# EAGLE board PCB Capacitor (EAGLE 9.6.2)
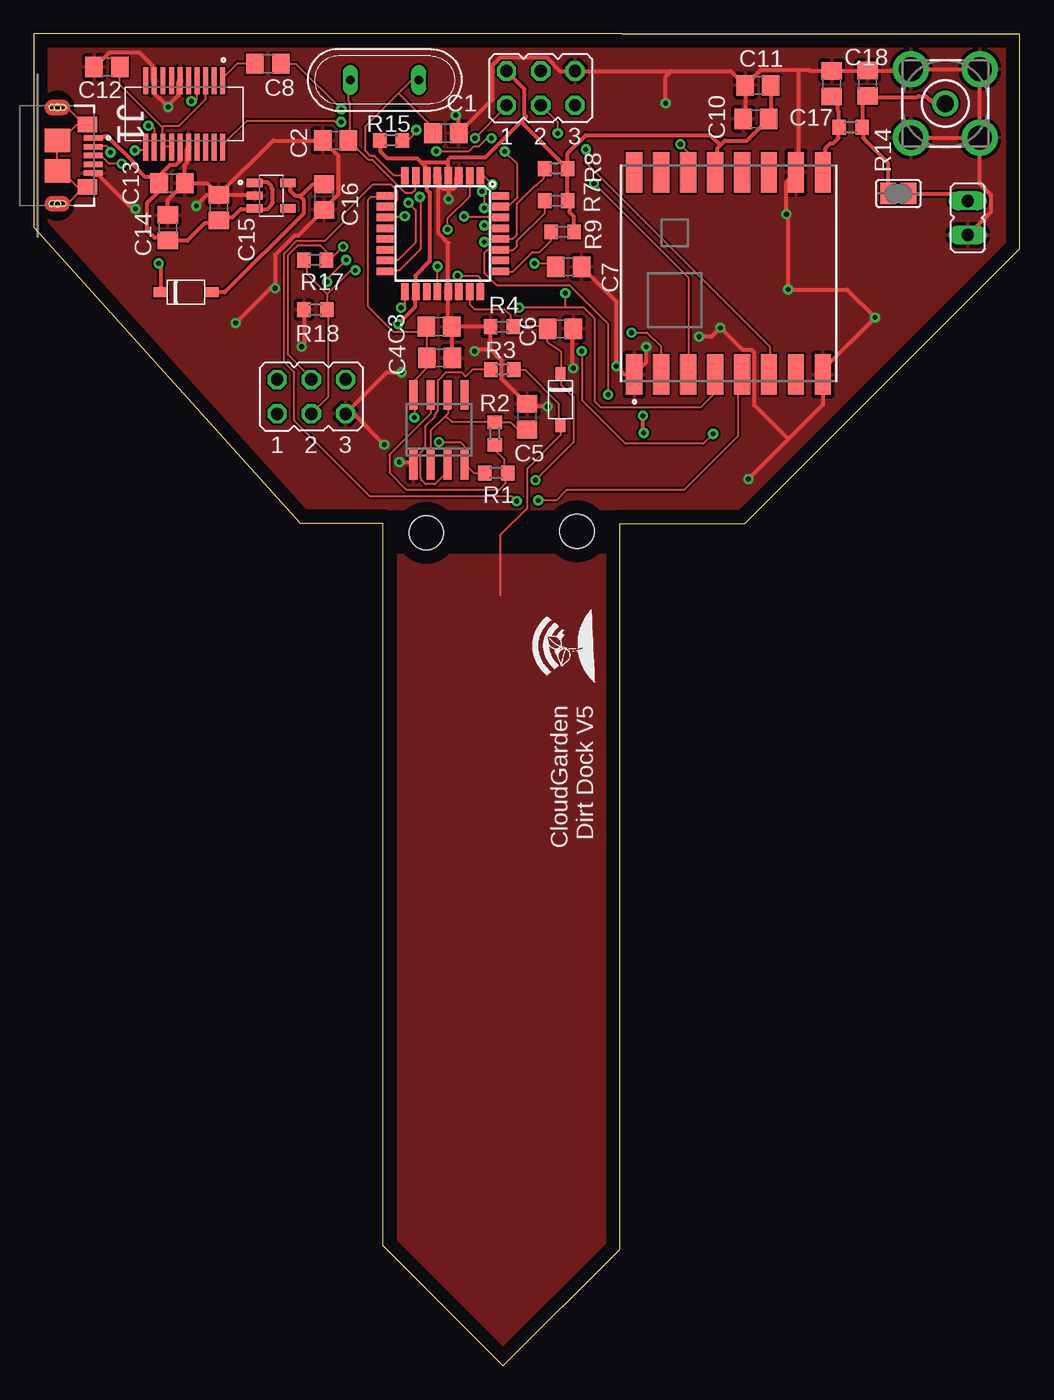
[diagram p0: board, top side]
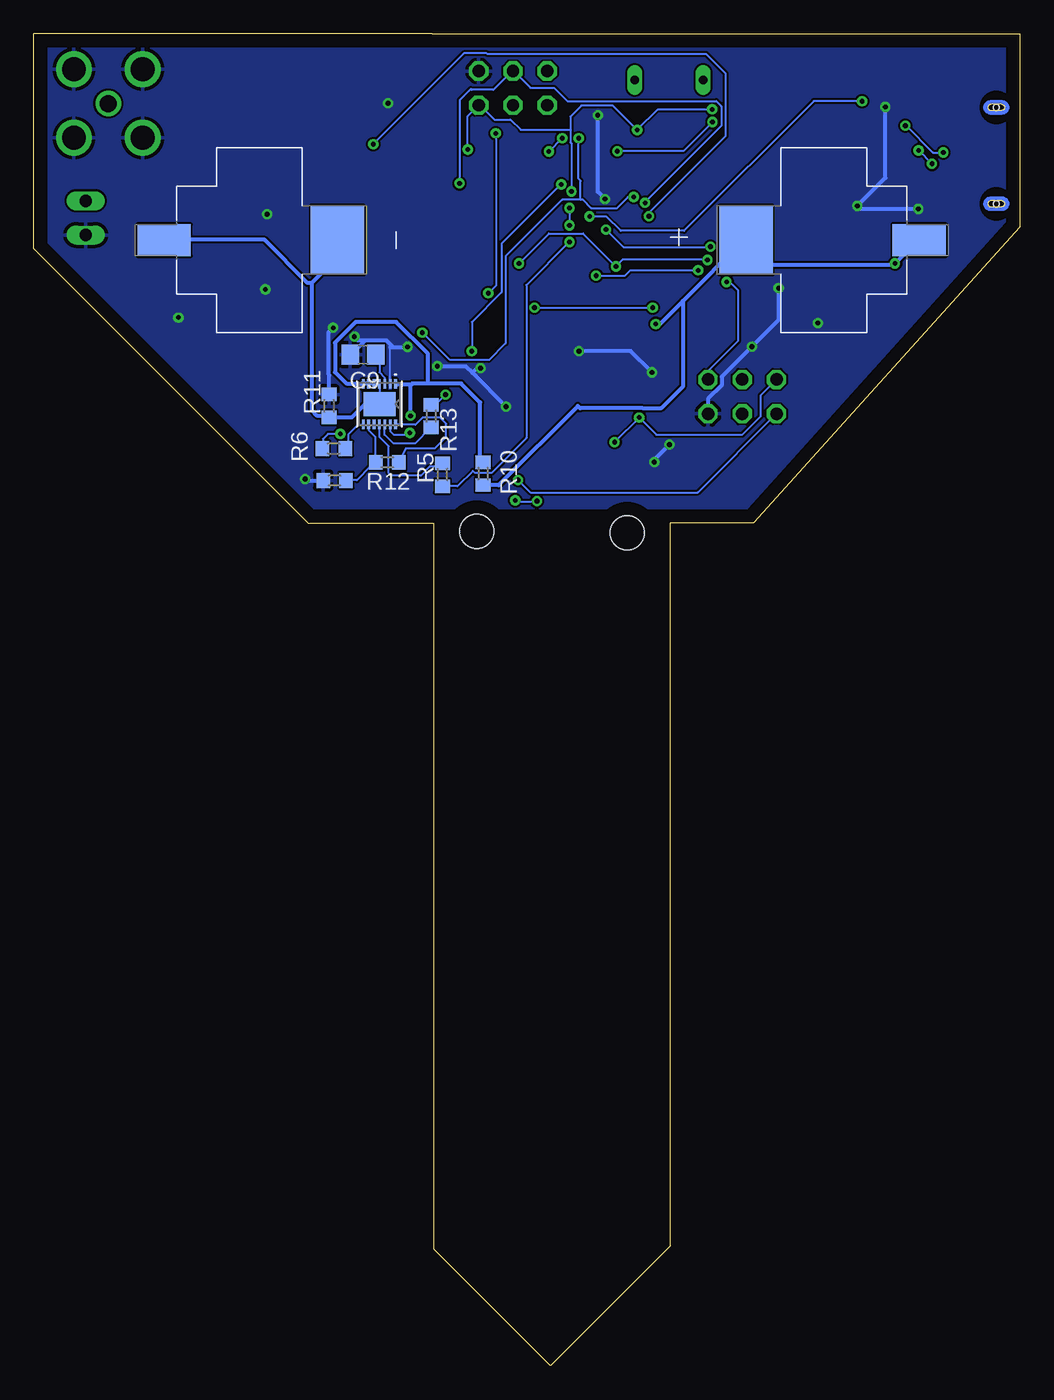
[diagram p1: board, bottom side, seen from below]

Size 73.18 x 98.83 mm. Coordinates in mm from the lower left corner, seen from the top.
Outline: 26.09,98.83 26.09,98.83
Outline: 43.64,98.83 43.64,98.83
Outline: 43.64,98.83 26.09,98.83
Outline: 26.09,98.83 0,98.83 0,84.48 19.79,62.51 25.93,62.51 25.93,8.89 34.82,0 43.48,8.66 43.48,62.48 52.78,62.48 73.18,82.88 73.18,98.83 43.64,98.83
Copper layers (1*16): Top 0.035mm / dielectric 1.5mm / Bottom 0.035mm
Design rules "default": minimum track width 6mil, minimum drill 0.35mm, track to track 6mil, track to pad 6mil, pad to pad 6mil, via to via 6mil, smd to smd 6mil, copper to edge 40mil, drill to drill 6mil, minimum pad ring 10mil, minimum via ring 8mil, stop-mask expansion 4mil, vias tented up to drill 0mil, thermal gap 10mil
Net classes: 0 default: width 0.152 mm; 1 Power: width 0.305 mm
Holes 2.54 mm at 29.13,61.8 40.31,61.93

## Footprints (pad centres in the part's own frame; a part is rotated, then mirrored left to right if it is on the bottom)
BAT_BK-53 = smd 2.34 x 3.96: 1+ 0,28.015; 2- 0,-28.015 | smd 5.08 x 3.96: 1- 0,-15.165; 2+ 0,15.165
C0805 = smd 1.3 x 1.5: 1 -0.95,0; 2 0.95,0
SOD-123 = smd 0.762 x 1.016: A 0,-1.905; C 0,1.905
SO08 = smd 0.6 x 2.2: 1 -1.905,-2.6; 2 -0.635,-2.6; 3 0.635,-2.6; 4 1.905,-2.6; 5 1.905,2.6; 6 0.635,2.6; 7 -0.635,2.6; 8 -1.905,2.6
GCT_USB3076-XX-X_REVC = smd 0.4 x 1.4: 1 -1.3,2.65; 2 -0.65,2.65; 3 0,2.65; 4 0.66,2.65; 5 1.3,2.65 | smd 0.1 x 0.1: 6 -3.549,0.73; 7 3.601,0.73 | smd 1.15 x 1.45: 8 -2.32,2.23; 9 2.32,2.23 | smd 1.75 x 1.9: 10 -1.125,0; 11 1.125,0 | hole 0.45: -3.575,0; 3.575,0
JP3Q = drill 0.914 octagon: 1 -2.54,-1.27; 2 -2.54,1.27; 3 0,-1.27; 4 0,1.27; 5 2.54,-1.27; 6 2.54,1.27
JP1 = drill 0.914 long: 1 0,-1.27; 2 0,1.27
QS = drill 0.61 long: 1 -2.54,0; 2 2.54,0
R0603 = smd 1 x 1.1: 1 -0.85,0; 2 0.85,0
SJ = smd 1.168 x 1.6: 1 -0.762,0; 2 0.762,0
SOT-23-5 = smd 1.16 x 0.61: 1 -1.23,0.95; 2 -1.23,0; 3 -1.23,-0.95; 4 1.23,-0.95; 5 1.23,0.95
MOD_COM-13909 = smd 3 x 1.2: 1 -7.5,7; 2 -7.5,5; 3 -7.5,3; 4 -7.5,1; 5 -7.5,-1; 6 -7.5,-3; 7 -7.5,-5; 8 -7.5,-7; 9 7.5,-7; 10 7.5,-5; 11 7.5,-3; 12 7.5,-1; 13 7.5,1; 14 7.5,3; 15 7.5,5; 16 7.5,7
21-0137_T1433-2C_MXM = smd 0.711 x 0.203: 1 -1.499,1.2; 2 -1.499,0.8; 3 -1.499,0.4; 4 -1.499,0; 5 -1.499,-0.4; 6 -1.499,-0.8; 7 -1.499,-1.2; 8 1.499,-1.2; 9 1.499,-0.8; 10 1.499,-0.4; 11 1.499,0; 12 1.499,0.4; 13 1.499,0.8; 14 1.499,1.2 | smd 1.803 x 2.388: 15 0,0
SOP63P599X175-20N = smd 1.97 x 0.41: 1 -2.47,2.857; 2 -2.47,2.223; 3 -2.47,1.587; 4 -2.47,0.953; 5 -2.47,0.318; 6 -2.47,-0.318; 7 -2.47,-0.953; 8 -2.47,-1.587; 9 -2.47,-2.223; 10 -2.47,-2.857; 11 2.47,-2.857; 12 2.47,-2.223; 13 2.47,-1.587; 14 2.47,-0.953; 15 2.47,-0.318; 16 2.47,0.318; 17 2.47,0.953; 18 2.47,1.587; 19 2.47,2.223; 20 2.47,2.857
TQFP32-08 = smd 1.27 x 0.559: 1 -4.293,2.8; 2 -4.293,2; 3 -4.293,1.2; 4 -4.293,0.4; 5 -4.293,-0.4; 6 -4.293,-1.2; 7 -4.293,-2; 8 -4.293,-2.8; 17 4.293,-2.8; 18 4.293,-2; 19 4.293,-1.2; 20 4.293,-0.4; 21 4.293,0.4; 22 4.293,1.2; 23 4.293,2; 24 4.293,2.8 | smd 0.559 x 1.27: 9 -2.8,-4.293; 10 -2,-4.293; 11 -1.2,-4.293; 12 -0.4,-4.293; 13 0.4,-4.293; 14 1.2,-4.293; 15 2,-4.293; 16 2.8,-4.293; 25 2.8,4.293; 26 2,4.293; 27 1.2,4.293; 28 0.4,4.293; 29 -0.4,4.293; 30 -1.2,4.293; 31 -2,4.293; 32 -2.8,4.293
BU-SMA-V = drill 1.27: 1 0,0 | drill 1.778: 2 -2.55,2.55; 3 2.55,2.55; 4 2.55,-2.55; 5 -2.55,-2.55

## Placement (x,y rotation side)
BT2  BK-53  [BAT_BK-53]  35.48,83.52 270 bottom
C1  22p  [C0805]  30.58,91.44 0 top
C2  22p  [C0805]  22.4,90.91 180 top
C3  140n  [C0805]  30.07,77.09 0 top
C4  120n  [C0805]  30.12,74.78 0 top
C5  660p  [C0805]  36.6,70.41 90 top
C6  1u  [C0805]  39.09,76.94 0 top
C7  0.1u  [C0805]  39.7,81.53 0 top
C8  0.1u  [C0805]  17.37,96.6 0 top
C9  0.47u  [C0805]  48.74,75.03 180 bottom
C10  10u  [C0805]  53.59,92.51 180 top
C11  0.1u  [C0805]  53.75,95 180 top
C12  0.1u  [C0805]  5.44,96.37 180 top
C13  10u  [C0805]  10.26,87.73 0 top
C14  0.1u  [C0805]  9.96,84.43 90 top
C15  1u  [C0805]  13.74,85.93 90 top
C16  1u  [C0805]  21.54,86.72 270 top
C17  opt  [C0805]  59.21,95.12 90 top
C18  opt  [C0805]  61.87,95.15 90 top
D1  DIODE_SCHOTTKY_CMMSH2-40  [SOD-123]  11.3,79.65 90 top
D11  DIODE_SCHOTTKY_CMMSH2-40  [SOD-123]  39.09,71.68 0 top
IC2  NE555D  [SO08]  30.07,69.44 0 top
J1  USB3076-XX-X_REVC  [GCT_USB3076-XX-X_REVC]  1.75,89.79 270 top
JP2  [JP3Q]  37.62,94.79 0 top
JP3  [JP1]  69.32,85.17 180 top
JP5  [JP3Q]  20.6,71.91 0 top
Q2  8 MHz  [QS]  26.04,95.4 0 top
R1  330  [R0603]  34.32,66.24 180 top
R2  1600  [R0603]  34.21,69.16 270 top
R3  10k  [R0603]  34.77,73.91 0 top
R4  1M  [R0603]  34.75,77.09 0 top
R5  150  [R0603]  42.85,66.12 90 bottom
R6  1k  [R0603]  50.9,68.05 0 bottom
R7  OPT  [R0603]  38.79,86.44 0 top
R8  OPT  [R0603]  38.76,88.82 0 top
R9  100  [R0603]  39.24,84.12 0 top
R10  10  [R0603]  39.83,66.19 90 bottom
R11  0.1  [R0603]  51.26,71.22 90 bottom
R12  10k  [R0603]  46.94,67.03 180 bottom
R13  150  [R0603]  43.69,70.46 270 bottom
R14  opt  [R0603]  60.63,91.9 0 top
R15  OPT  [R0603]  26.52,90.91 180 top
R17  10k  [R0603]  20.88,82.04 0 top
R18  THERM  [R0603]  20.9,78.36 0 top
R19  THERM  [R0603]  50.85,65.68 180 bottom
SJ1  [SJ]  64.16,86.97 0 top
TLV75533PDBVR  LP2985-33DBVR  [SOT-23-5]  17.63,86.82 0 top
U1  COM-13909  [MOD_COM-13909]  51.56,81.05 90 top
U2  MAX17201G+T  [21-0137_T1433-2C_MXM]  47.52,71.35 270 bottom
U4  FT231XS-R  [SOP63P599X175-20N]  11.18,92.89 270 top
U5  ATMEGA328P_TQFP  [TQFP32-08]  30.35,84 270 top
X1  BU-SMA-V  [BU-SMA-V]  67.64,93.65 0 top

## Library data of the parts
BT2 = BK-53; DESCRIPTION: Battery Contact Clip AA 1 Cell SMD (SMT) Tab; DIGI-KEY_PART_NUMBER: BK-53-TR-ND; MF: MPD (Memory Protection Devices); MP: BK-53; PACKAGE: None; PURCHASE-URL: https://pricing.snapeda.com/search/part/BK-53/?ref=eda
C1-C18 = rcl; SPICEPREFIX: C
D1 D11 = diode
IC2 = linear
J1 = USB3076-XX-X_REVC; AVAILABILITY: Unavailable; DESCRIPTION: USB - micro B USB 2.0 Receptacle Connector 5 Position Surface Mount, Right Angle; Through Hole, 2.35mm profile, 5 Pins, Horizontal, Bottom mount; MF: Global Connector Technology; MP: USB3076-30-A; PACKAGE: None; PRICE: None
JP2 JP3 JP5 SJ1 = jumper
Q2 = special
R1-R15 R17-R19 = rcl; SPICEPREFIX: R
TLV75533PDBVR = IC; CREATED_BY: PCBLayout.com; DIGIKEY_PART_NUMBER: 296-18476-2-ND; MANUFACTURER: Texas Instruments; MPN: LP2985-33DBVR; PACKAGE: SOT-23-5
U1 = COM-13909; DESCRIPTION: General ISM < 1GHz Transceiver Module 915MHz Surface Mount; DIGI-KEY_PART_NUMBER: 1568-1394-ND; MF: SparkFun Electronics; MP: COM-13909; PACKAGE: None; PURCHASE-URL: https://pricing.snapeda.com/search/part/COM-13909/?ref=eda
U2 = MAX17201G+T; BUILT_BY: UL_Team_Molly; COPYRIGHT: Copyright (C) 2018 Accelerated Designs. All rights reserved; MANUFACTURER_PART_NUMBER: MAX17201G+T; REVISION: 1; SOURCELIBRARY: Maxim_2018-10-24; VENDOR: Maxim Integrated Products
U4 = FT231XS-R; DESCRIPTION: USB Bridge, USB to UART USB 2.0 UART Interface 20-SSOP; DIGI-KEY_PART_NUMBER: 768-1129-1-ND; MF: FTDI,; MP: FT231XS-R; PACKAGE: SSOP-20 FTDI; PURCHASE-URL: https://pricing.snapeda.com/search/part/FT231XS-R/?ref=eda
U5 = SparkFun-IC-Microcontroller; PROD_ID: IC-09069
X1 = con-coax; OC_FARNELL: unknown; OC_NEWARK: unknown

## Nets
5V [Power]: C13.1 C14.1 C15.1 J1.1 TLV75533PDBVR.1 TLV75533PDBVR.3 U4.15
ALERT: R6.1 U5.1
ANTEX: JP3.1 SJ1.2
AREF: C7.1 JP5.6 U5.20
CAP: D11.A R3.2
DTR: C8.1 U4.1
FTDR: C12.1 U4.3 U4.13 U4.14
GND [Power]: C1.2 C2.2 C3.2 C4.2 C5.2 C6.2 C7.2 C9.2 C10.2 C11.2 C12.2 C13.2 C14.2 C15.2 C16.2 C17.2 C18.2 IC2.1 J1.5 JP2.6 JP3.2 JP5.5 R4.1 R11.2 R18.1 R19.2 TLV75533PDBVR.2 U1.1 U1.8 U1.10 U2.2 U4.6 U4.9 U4.16 U5.3 U5.5 U5.21 X1.2 X1.3 X1.4 X1.5
MISO: JP2.1 U1.2 U5.16
MOSI: JP2.4 U1.3 U5.15
N$1: R12.1 U2.14
N$2: IC2.7 R1.1 R2.2
N$3: C5.1 IC2.2 IC2.6 R2.1
N$4 [Power]: BT2.1- BT2.2- R11.1 U2.4 U2.15
N$5: C9.1 U2.3
N$6: C1.1 Q2.2 U5.8
N$7: C2.1 Q2.1 U5.7
N$8: J1.2 U4.12
N$9: IC2.3 R3.1
N$10: J1.3 U4.11
N$12 [Power]: R10.2 U2.1 U2.5 U2.6 U2.7 U2.13
N$13: R12.2 R19.1 U2.9
N$14: R6.2 U2.8
N$15: R13.2 U2.12
N$16: R5.2 U2.11
N$17 [Power]: C16.1 D1.A TLV75533PDBVR.5
N$19 [Power]: C18.1 R14.2 SJ1.1 X1.1
N$24 [Power]: C17.1 R14.1 U1.9
RDY: U1.14 U5.11
RESET: C8.2 JP2.5 R15.1 U1.6 U5.29
RXI: U4.4 U5.30
SCK: JP2.3 U1.4 U5.17
SCL: R5.1 R8.1 U5.28
SDA: R7.1 R13.1 U5.27
SHIELD: J1.6 J1.7 J1.8 J1.9 J1.10 J1.11
SOILI: C3.1 C4.1 IC2.4 IC2.8 JP5.2 R1.2 U5.9
SOILO: C6.1 D11.C JP5.1 R4.2 U5.23
SS: U1.5 U5.10
THERMI: JP5.4 R17.2 U5.2
THERMO: JP5.3 R17.1 R18.2 U5.24
TXO: U4.20 U5.31
VIN [Power]: BT2.1+ BT2.2+ C10.1 C11.1 D1.C JP2.2 R7.2 R8.2 R9.2 R10.1 R15.2 U1.13 U5.4 U5.6 U5.18
VREAD: R9.1 U5.25

## Tracks (layer width: path | path; a pad name or v marks a point on that pad's centre or on a via)
5V
  Top 0.305: J1.1 4.47,91.08 5.08,91.08 5.23,91.24 5.46,91.24 7.44,89.26 7.44,89.03 8.28,88.19 8.81,88.19 9.27,87.73 C13.1 | U4.15 10.87,90.4 10.87,89.41 10.57,89.1 10.11,89.1 9.04,88.04 C13.1 | TLV75533PDBVR.1 16.43,87.81 17.35,87.81 17.65,87.5 17.65,87.35 17.73,87.27 17.73,86.28 17.65,86.21 17.65,86.13 17.35,85.83 16.51,85.83 TLV75533PDBVR.3 16.36,85.83 15.37,85.83 14.76,85.22 14,85.22 13.77,84.99 C15.1 13.61,84.91 13.46,84.76 12.7,84.76 11.4,83.46 C14.1 9.88,83.62 9.8,83.69 8.97,83.69 8.43,84.23 8.43,86.28 9.35,87.2 9.35,87.58 C13.1
ALERT  (via drill 0.35)
  Top 0.152: v50.42,69.14 49.68,68.4 43.92,68.4 40.67,71.65 v40.67,75.29 | v34.04,87.66 33.43,88.27 33.2,88.27 U5.1
  Bottom 0.152: v50.42,69.14 51.33,69.14 51.71,68.76 51.71,68.07 R6.1 | v40.67,75.29 40.67,77.44 38.46,79.65 38.46,83.24 v34.04,87.66
ANTEX
  Top 0.305: SJ1.2 68.78,86.97 JP3.1
AREF  (via drill 0.35)
  Top 0.152: v29.97,81.56 29.92,81.56 29.92,79.73 U5.20 | v37.16,81.79 38.46,81.79 38.68,81.56 C7.1 | v23.19,82.04 21.77,80.62 v21.77,80.42
  Bottom 0.152: v37.16,81.79 34.95,84 32.41,84 v29.97,81.56 29.44,82.09 23.24,82.09 v23.19,82.04 | v21.77,80.42 21.78,80.4 21.53,80.4 20.9,79.78 20.9,76.05 23.14,73.81 JP5.6
CAP
  Top 0.152: R3.2 35.64,73.86 36.47,73.86 38.99,71.35 38.99,69.9 39.07,69.82 D11.A 39.09,69.04 36.63,66.57 36.63,63.65 34.65,61.67 34.65,57.15
  pour Top: 24.66,60.17 24.82,60.17 44.98,60.17 44.98,-1.32 24.66,-1.32
DTR
  Top 0.152: C8.1 16.36,96.65 15.14,96.65 14.07,95.58 14.07,95.43 U4.1
FTDR
  Top 0.152: 9.54,91.88 9.58,91.85 9.58,90.48 U4.13 9.65,90.48 10.19,90.48 U4.14 | 9.54,91.88 6.38,95.05 6.38,96.34 C12.1 | 9.54,91.88 9.65,92 10.79,92 12.78,93.98 12.78,95.35 U4.3
GND  (via drill 0.35)
  Top 0.305: U1.1 43.85,73.55 v43.23,74.17 43.23,78.95 C7.2 | v38.13,71.17 36.79,71.17 C5.2 34.73,73.23 34.73,74.59 33.9,75.42 | C6.2 39.93,76.83 39.93,74.12 v40.03,74.02 | 33.9,75.42 R4.1 C3.2 | C4.2 31.02,74.83 C3.2 | C3.2 30.75,77.36 U5.21 30.75,83.29 30.03,84.02 30.03,87.39 30.17,87.53 | 47.32,96.06 JP2.6 39.05,96.06 38.04,97.08 34.66,97.08 34.06,96.48 34.06,93.97 C1.2 31.53,92.58 v31.32,92.79 | 47.32,96.06 51.73,96.06 C11.2 | C11.2 52.8,92.66 C10.2 | C11.2 53.95,96.15 56.77,96.15 | 56.77,96.15 57.53,96.15 57.61,96.07 C17.2 59.23,96.1 C18.2 64.99,96.1 X1.2 X1.3 X1.4 | X1.5 X1.4 | X1.4 70.19,87.71 71.04,86.86 71.04,85.62 JP3.2 | 56.77,96.15 56.77,88.76 U1.10 55.85,87.84 v55.85,85.45 55.98,85.32 v55.98,79.86 60.35,79.86 v62.43,77.78 58.56,73.9 U1.8 58.56,71.31 55.99,68.75 | C14.2 9.96,86.48 C13.2 | C13.2 12.89,87.73 C15.2 | C15.2 16.34,86.88 TLV75533PDBVR.2 | C13.2 11.21,89.1 11.37,89.26 11.37,90.29 U4.16 | J1.5 4.54,88.35 4.83,88.35 7.36,85.83 v7.54,85.83 | v12.06,86.06 12.89,86.88 C15.2 | U4.6 10.73,95.23 10.73,94.26 9.98,93.51 v9.98,93.4 9.31,94.07 9.27,94.07 8.95,94.38 U4.9 8.83,95.48 8.83,96.46 7.86,97.42 5.61,97.42 4.55,96.37 C12.2 | C15.2 17.77,90.91 C2.2 22.59,89.77 22.59,86.89 21.54,85.83 C16.2 19.62,83.85 19.35,83.85 17.91,82.4 v17.91,79.96 17.58,79.96 v14.99,77.37 | v26.01,68.35 23.72,70.64 JP5.5 26.21,73.71 v27.3,73.71 | v27.13,67.06 27.96,67.06 IC2.1 | 30.17,87.53 30.35,87.35 30.78,87.35 | 30.78,87.35 31.16,87.35 31.34,87.53 31.34,88.07 U5.3 | 30.17,87.53 30.17,88.07 U5.5 | 44.87,73.86 U1.1 | v45.44,75.59 45.44,74.43 U1.1 | 55.99,68.75 v53.04,65.79 | v49.38,76.35 50.29,76.35 v50.95,77.01 52.61,75.36 53.29,75.36 53.47,75.18 53.47,71.27 55.99,68.75
  Top 0.305: v32.72,75.29 32.85,75.42 33.9,75.42 | R18.1 20.05,75.78 v19.89,75.61 | 30.78,87.35 v30.78,86.56 | v46.89,93.68 46.89,95.63 47.32,96.06
  Bottom 0.152: U2.2 46.72,75.58
  Bottom 0.305: v43.23,74.17 41.12,74.17 40.63,73.67 | 40.63,73.67 v38.13,71.17 | 40.63,73.67 40.28,74.02 v40.03,74.02 | v7.54,85.83 11.84,85.83 v12.06,86.06 9.98,88.14 v9.98,93.4 | v26.01,68.35 27.13,67.23 v27.13,67.06 | 48.57,76.09 47.02,76.09 46.52,75.59 | C9.2 49.62,75.03 48.57,76.09 | 46.52,75.59 46.71,75.59 46.72,75.58 | 46.52,75.59 v45.44,75.59 | v53.04,65.79 52.93,65.68 R19.2 | R11.2 51.26,73.5 51.28,73.52 51.28,76.68 v50.95,77.01 | v49.38,76.35 49.11,76.09 48.57,76.09 | v27.3,73.71 28.88,75.29 v32.72,75.29 | v17.91,79.96 17.91,77.59 v19.89,75.61 22.12,73.38 22.12,72.76 23.14,71.74 JP5.5 | v30.78,86.56 31.32,87.1 v31.32,92.79
  pour Top: -5.21,99.72 74.04,99.72 74.04,63.53 -5.26,63.53 -5.26,99.7
  pour Bottom: -5.18,99.7 74.09,99.7 74.09,63.65 -5.21,63.65 -5.21,99.7
MISO  (via drill 0.35)
  Top 0.152: v28.65,86.72 28.7,86.67 28.7,82.86 27.1,81.25 26.11,81.25 U5.16 | v32.74,91.08 35.03,93.37 35.03,93.52 JP2.1 | v44.35,76.66 45.52,76.66 46.53,75.64 46.53,73.56 U1.2
  Bottom 0.152: v32.74,91.08 32.74,88.06 32.59,87.91 32.59,86.51 | 32.59,86.51 32.44,86.51 31.83,85.9 29.9,85.9 29.08,86.72 v28.65,86.72 | 32.59,86.51 33.96,86.51 38.15,82.32 38.15,75.87 39.4,74.63 42.29,74.63 44.32,76.66 v44.35,76.66
MOSI  (via drill 0.35)
  Top 0.152: v27.81,86.28 28.35,85.75 28.35,83.34 27.03,82.02 26.11,82.02 U5.15 | v41.58,87.73 48.59,80.72 48.59,73.56 U1.3
  Bottom 0.152: v27.81,86.28 27.81,86.33 22.15,92 22.15,93.45 22.53,93.83 33.58,93.83 34.57,94.82 36.32,94.82 37.62,96.11 | v41.58,87.73 41.58,93.9 40.74,94.74 40.67,94.67 39.07,94.67 37.62,96.11 | 37.62,96.11 JP2.4
N$1
  Bottom 0.152: U2.14 46.3,69.82 44.86,69.82 44.32,70.36 43.03,70.36 42.57,69.9 42.57,68.91 43.41,68.07 45.53,68.07 R12.1
N$2
  Top 0.152: R2.2 34.26,68.3 34.26,67.92 34.95,67.23 34.95,66.4 35.1,66.24 R1.1 35.03,66.24 35.03,65.48 34.57,65.02 27.64,65.02 26.39,66.27 26.39,67.59 29.46,70.66 29.46,72.03 IC2.7
N$3
  Top 0.152: C5.1 36.55,69.52 35.86,69.52 35.41,69.98 34.26,69.98 R2.1 34.19,70.05 30.99,70.05 30.57,70.47 | 30.57,70.47 30.76,70.66 30.76,72.03 IC2.6 | 30.57,70.47 29.46,69.37 29.46,66.85 IC2.2
N$4
  Bottom 0.152: U2.4 U2.15
  Bottom 0.305: U2.15 48.59,71.35 49.58,70.36 51.26,70.36 R11.1 51.33,70.51 52.17,70.51 52.55,70.89 52.55,80.34 | 52.55,80.34 50.72,82.17 50.72,83.46 BT2.1- | 52.55,80.34 52.86,80.34 56.06,83.54 63.45,83.54 BT2.2-
N$5
  Bottom 0.152: U2.3 47.14,72.87 47.14,73.33 47.52,73.71 47.52,74.78 47.75,75.01 C9.1
N$6
  Top 0.152: 27.06,94.4 28.02,95.35 28.55,95.35 Q2.2 | 27.06,94.4 24.59,91.92 24.59,90.17 24.97,89.79 25.27,89.79 26.72,88.34 27.48,88.34 U5.8 | 27.06,94.4 29.62,91.85 29.62,91.49 C1.1
N$7
  Top 0.152: U5.7 28.32,88.27 28.32,87.27 28.09,87.05 27.56,87.05 25.12,89.48 24.82,89.48 23.37,90.93 C2.1 23.47,90.94 23.47,93.73 23.37,93.83 23.37,94.29 23.44,94.36 23.44,95.35 Q2.1
N$8  (via drill 0.35)
  Top 0.152: v5.69,90.02 5.69,90.25 5.46,90.48 4.47,90.48 J1.2 | v8.51,92 8.74,92 8.97,91.77 8.97,90.48 U4.12
  Bottom 0.152: v5.69,90.02 6.45,90.02 8.43,92 v8.51,92
N$9
  Top 0.152: R3.1 33.88,73.94 32.59,73.94 32.05,73.41 31.75,73.71 30.61,73.71 30,73.1 30,70.82 29.77,70.59 29.77,70.43 29.08,69.75 29.08,68.22 28.85,68 28.85,67.92 28.7,67.77 28.7,65.86 28.78,65.79 28.78,65.71 29.08,65.41 29.77,65.41 30.68,66.32 30.68,66.78 IC2.3
N$10  (via drill 0.35)
  Top 0.152: J1.3 5,89.79 5.61,89.18 v6.53,89.18 | v7.52,90.17 8.13,90.17 8.36,90.4 U4.11
  Bottom 0.152: v7.52,90.17 v6.53,89.18
N$12  (via drill 0.35)
  Top 0.305: v45.26,69.22 45.21,69.27 v45.21,70.49
  Bottom 0.152: U2.13 46.72,69.36 46.46,69.09 45.39,69.09
  Bottom 0.305: 43.92,72.87 41.45,72.87 40.06,71.48 40.06,67.31 39.83,67.08 R10.2 | 43.92,72.87 45.08,72.87 45.11,72.85 | 43.92,72.87 43.92,75.08 46.28,77.44 49.28,77.44 50.83,75.9 50.83,73.71 50.8,73.71 49.96,72.87 48.82,72.87 U2.7 48.67,72.87 48.44,72.87 U2.6 48.29,72.87 47.95,72.87 U2.5 | v45.21,70.49 45.21,72.75 45.11,72.85 | 45.39,69.09 v45.26,69.22 | U2.1 45.11,72.85
N$13
  Bottom 0.152: U2.9 48.29,69.82 48.29,69.37 47.83,68.91 47.83,67.06 R12.2 48.18,66.73 49.2,65.71 49.96,65.71 R19.1
N$14
  Bottom 0.152: U2.8 48.74,69.82 49.12,69.82 49.81,69.14 49.81,68.3 50.04,68.07 R6.2
N$15
  Bottom 0.152: U2.12 47.14,69.82 47.14,69.09 46.48,68.43 44.88,68.43 43.71,69.6 R13.2
N$16
  Bottom 0.152: U2.11 47.52,68.91 46.84,68.22 46.84,66.22 46.66,66.04 44.45,66.04 43.79,66.7 43.1,66.7 42.88,66.93 R5.2
N$17
  Top 0.305: D1.A 14.17,79.65 20.02,85.5 20.02,86.51 19.79,86.74 | 19.79,86.74 19.71,86.82 19.41,86.82 19.02,87.2 19.02,87.58 18.87,87.73 TLV75533PDBVR.5 | 19.79,86.74 20.7,87.66 C16.1
N$19
  Top 0.305: SJ1.1 63.37,86.97 63.37,89.26 61.54,91.08 61.54,91.77 R14.2 61.47,91.92 61.47,93.75 61.85,94.13 C18.1 62,94.13 65.58,94.13 65.66,94.21 66.19,94.21 66.5,93.9 66.57,93.9 66.8,93.68 67.64,93.68 X1.1
N$24
  Top 0.305: C17.1 59.26,94.13 59.64,93.75 59.64,93.14 59.72,93.07 59.72,91.92 R14.1 59.72,91.77 59.72,91.08 59.33,90.7 59.11,90.7 58.72,90.32 58.72,88.72 58.57,88.57 U1.9
RDY  (via drill 0.35)
  Top 0.152: v27.53,85.29 27.46,85.22 26.11,85.22 U5.11 | v47.98,90.63 48.59,90.02 48.59,88.57 U1.14
  Bottom 0.152: v27.53,85.29 27.53,85.55 21.84,91.24 21.84,95.89 23.29,97.33 39.52,97.33 39.6,97.41 41.2,97.41 v47.98,90.63
RESET  (via drill 0.35)
  Top 0.152: v28.4,91.69 28.47,91.62 27.79,90.93 27.41,90.93 R15.1 | v33.43,84.61 33.58,84.46 34.65,84.46 U5.29 | v33.43,85.9 33.43,86.97 v33.27,87.12 | v22.83,93.22 19.48,96.57 18.34,96.57 C8.2 | v40.97,90.25 40.97,89.26 54.61,75.62 54.61,73.56 U1.6
  Bottom 0.152: 33.35,91.69 37.03,91.69 37.81,92.47 39,92.47 40.06,93.52 JP2.5 40.97,92.71 v40.97,90.25 | v33.43,85.9 v33.43,84.61 | v33.27,87.12 33.27,90.7 33.35,90.78 33.35,91.69 | 33.35,91.69 33.35,92.68 32.54,93.5 30.2,93.5 v28.4,91.69 26.87,93.22 v22.83,93.22
RXI  (via drill 0.35)
  Top 0.152: v31.93,85.27 34.65,85.27 U5.30 | v11.71,93.83 11.94,93.83 12.09,93.98 12.09,95.35 U4.4
  Bottom 0.152: v31.93,85.27 31.9,85.29 30.71,85.29 29.62,84.2 24.92,84.2 15.29,93.83 v11.71,93.83
SCK  (via drill 0.35)
  Top 0.152: v27.25,78.51 27.33,78.51 27.56,78.74 27.56,79.65 U5.17 | 39.45,78.51 40.82,78.51 41.63,77.7 41.63,71.55 42.09,71.09 49.48,71.09 50.5,72.11 50.5,73.48 U1.4 | 39.45,78.51 v36.02,78.51 | JP2.3 38.89,92.25 v38.89,91.44 | 39.45,78.51 v39.45,79.58
  Bottom 0.152: v36.02,78.51 v27.25,78.51 | v38.89,91.44 38.89,80.14 v39.45,79.58
SCL  (via drill 0.35)
  Top 0.152: v33.43,83.39 33.58,83.54 34.65,83.54 U5.28 34.65,83.62 35.56,83.62 35.86,83.92 35.86,86.21 37.24,87.58 37.31,87.58 37.85,88.11 37.85,88.8 R8.1
  Bottom 0.152: v33.43,83.39 36.63,80.19 36.63,68.83 39.22,66.24 40.44,66.24 40.59,66.4 41.73,65.25 42.8,65.25 R5.1
SDA  (via drill 0.35)
  Top 0.152: v42.62,72.06 42.62,77.32 39.75,80.19 34.34,80.19 33.43,81.1 33.43,82.55 33.65,82.78 34.65,82.78 | 34.65,82.78 35.56,82.78 35.86,83.08 35.86,83.46 37.92,85.52 37.92,86.44 R7.1 | 34.65,82.78 U5.27
  Bottom 0.152: v42.62,72.06 43.41,71.27 43.64,71.27 R13.1
SHIELD
  Top 0.152: J1.7 3.76,87.47 J1.9 3.94,87.5 3.17,87.5 2.03,88.65 1.8,88.65 J1.11 1.73,88.72 1.73,90.86 J1.10 1.8,90.93 2.03,90.93 3.17,92.08 3.94,92.08 J1.8 3.71,92.11 J1.6
SOILI  (via drill 0.35)
  Top 0.152: R1.2 32.66,66.24 32.13,66.78 31.98,66.78 IC2.4 31.98,68.22 31.67,68.53 v30.07,68.53 | U5.9 26.03,86.74 25.04,86.74 24.82,86.51 24.82,78.59 26.72,76.68 28.7,76.68 29.08,77.06 C3.1 28.85,76.76 29.16,76.45 29.16,74.78 C4.1 29.24,74.78 29.24,74.09 28.17,73.03 IC2.8 28.17,72.03 28.24,71.96 v28.24,70.36
  Bottom 0.152: v30.07,68.53 v28.24,70.36 26.97,69.09 20.6,69.09 19.25,70.43 19.25,71.98 JP5.2
SOILO  (via drill 0.35)
  Top 0.152: U5.23 32.36,79.65 32.36,78.74 32.74,78.36 34.95,78.36 35.41,77.9 35.41,77.44 35.64,77.22 R4.2 35.64,77.14 38.01,77.14 C6.1 38.14,75.93 39.14,75.23 39.14,73.63 D11.C 39.14,73.56 39.14,72.8 40.06,71.88 40.06,68.53 v37.24,65.71
  Bottom 0.152: JP5.1 23.9,64.8 36.32,64.8 v37.24,65.71
SS  (via drill 0.35)
  Top 0.152: v35.84,64.16 35.51,64.49 24.97,64.49 19.33,70.13 19.33,73.71 18.57,74.47 18.57,82.52 19.51,83.46 21.62,83.46 22.99,84.84 22.99,85.45 25.2,87.66 26.49,87.66 26.95,87.2 26.95,86.44 26.57,86.06 26.11,86.06 U5.10 | U1.5 52.55,73.48 52.25,73.18 52.25,68.96 48.26,64.97 39.55,64.97 38.79,64.21 v37.44,64.21
  Bottom 0.152: v37.44,64.21 37.44,64.14 35.86,64.14 v35.84,64.16
THERMI  (via drill 0.35)
  Top 0.152: 21.69,82.32 21.69,82.7 21.23,83.16 19.63,83.16 18.87,82.4 18.87,75.01 20.55,73.33 20.55,73.18 JP5.4 | 21.69,82.32 21.69,82.09 R17.2 21.69,82.32 | v30.71,84.3 30.71,85.14 32.36,86.79 32.36,88.27 U5.2 | v22.96,83.03 22.25,82.32 21.69,82.32
  Bottom 0.152: v30.71,84.3 29.41,83.01 22.99,83.01 v22.96,83.03
THERMO  (via drill 0.35)
  Top 0.152: 21.77,79.5 R18.2 | 21.77,79.5 20.24,81.03 20.24,81.86 20.09,82.02 R17.1 | v31.45,80.87 32.97,80.87 33.12,80.72 33.12,79.73 U5.24 | v23.88,81.28 23.55,81.28 21.77,79.5 | JP5.3 21.84,71.88 21.84,78.28 R18.2 | R18.2
  Bottom 0.152: v23.88,81.28 28.91,81.28 29.31,80.87 v31.45,80.87
TXO  (via drill 0.35)
  Top 0.152: v34.95,90.09 35.86,89.18 35.86,86.67 35.26,86.06 34.65,86.06 U5.31 | v33.96,91.08 33.65,91.08 33.05,90.48 32.66,90.48 32.28,90.09 29.9,90.09 v29.87,90.12 | v22.81,92.28 22.4,92.28 22.3,92.38 15.82,92.38 14.07,90.63 14.07,90.48 U4.20
  Bottom 0.152: v33.96,91.08 v34.95,90.09 | v29.87,90.12 24.97,90.12 v22.81,92.28
VIN  (via drill 0.35)
  Top 0.305: 28.75,89.28 29.13,88.9 29.13,88.3 U5.6 29.15,87.27 29.39,87.04 29.39,81.94 28.32,80.87 28.32,79.73 U5.18 28.32,79.58 28.32,78.59 v27.03,77.29 | 28.75,89.28 28.47,89.56 26.26,89.56 25.73,90.09 25.73,90.86 R15.2 | C11.1 54.7,92.61 C10.1 52.93,90.89 51.3,90.89 50.95,90.55 | 50.95,90.55 50.72,90.32 50.72,88.72 50.57,88.57 U1.13 | R8.2 39.6,88.8 39.6,86.44 R7.2 39.75,86.36 39.75,85.6 40.06,85.29 40.06,84.15 R9.2 | JP2.2 36.4,94.74 36.4,92.84 36.55,92.68 36.12,92.25 | 50.95,90.55 50.19,91.31 40.97,91.31 39.61,89.95 R8.2 | 36.12,92.25 33.5,89.64 30.91,89.64 30.76,89.48 30.76,89.31 30.73,89.28 30.56,89.28 | v9.27,81.79 9.42,81.64 9.42,79.65 D1.C | 28.75,89.28 30.56,89.28 | 30.56,89.28 30.75,89.08 U5.4 | R8.2 36.18,92.25 36.12,92.25
  Bottom 0.305: BT2.1+ 7.52,83.54 v9.27,81.79 9.35,81.71 18.57,81.71 20.24,83.39 BT2.2+ 20.32,83.46 20.55,83.46 25.02,78.99 | 25.02,78.99 26.87,77.14 v27.03,77.29 | R10.1 39.83,65.33 38.68,65.33 32.8,71.21 32.64,71.04 27.96,71.04 27.94,71.02 26.64,71.02 25.02,72.64 25.02,78.99
VREAD
  Top 0.152: R9.1 38.38,84.07 38.38,83.46 37.54,82.63 37.01,82.63 35.56,81.18 34.65,81.18 U5.25

## Text on the board
tPlace: CloudGarden / Dirt Dock V5